# Altium PCB Machine_Side_v1.0.PcbDoc
Units mm, origin at the board's own origin, x right, y up, seen from the top; angles counter-clockwise.
Board outline 21.7 x 29.9 mm, 2 copper layers (Top Layer, Bottom Layer), stack 1.569 mm thick; 4 components, 7 nets, 22 pads, 3 vias.
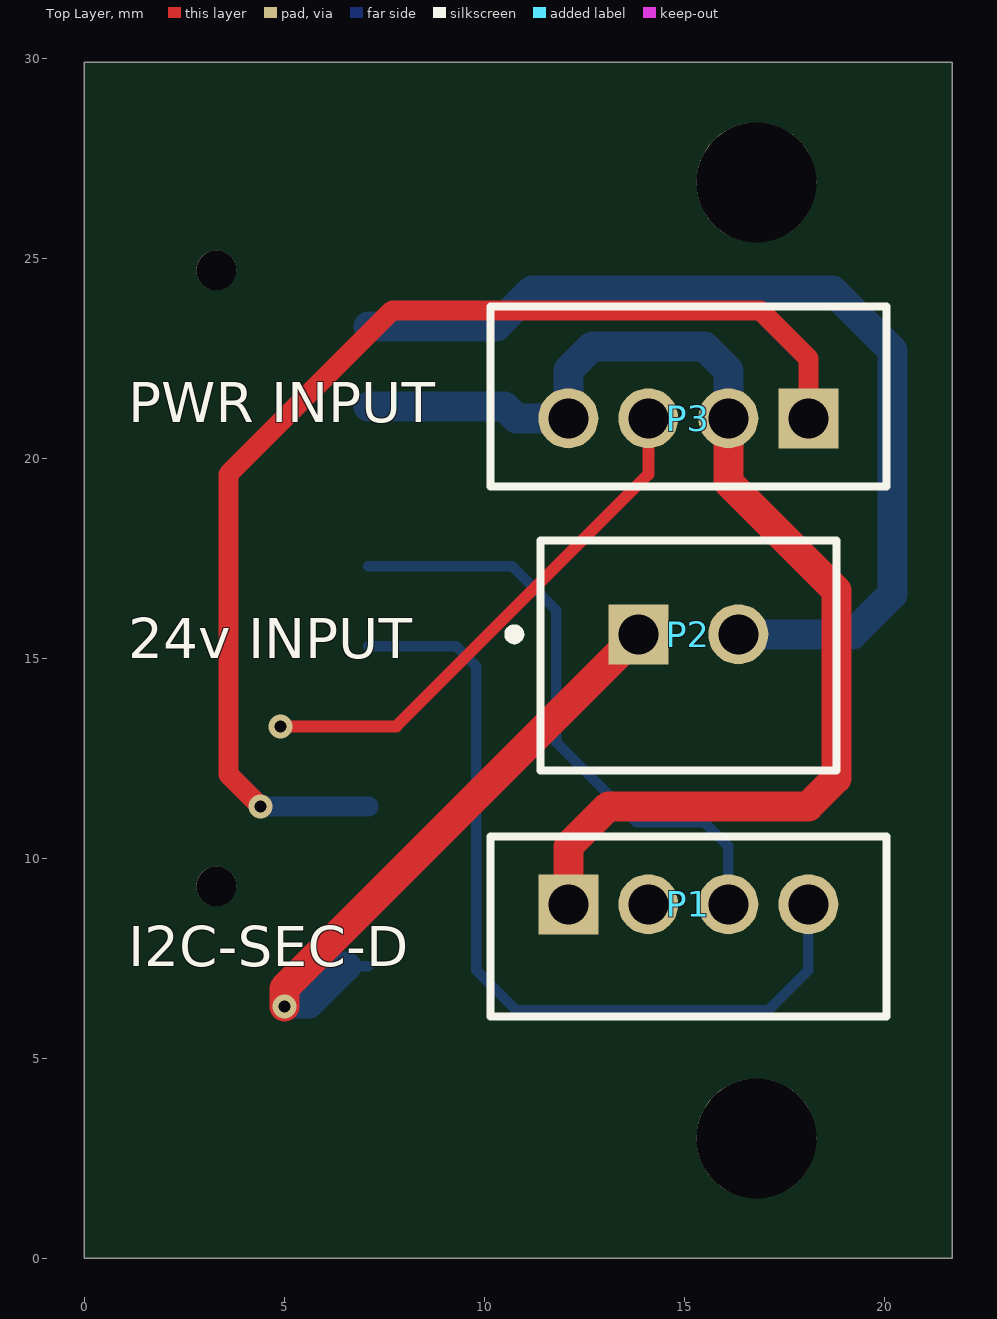
[diagram p0: Top Layer view]
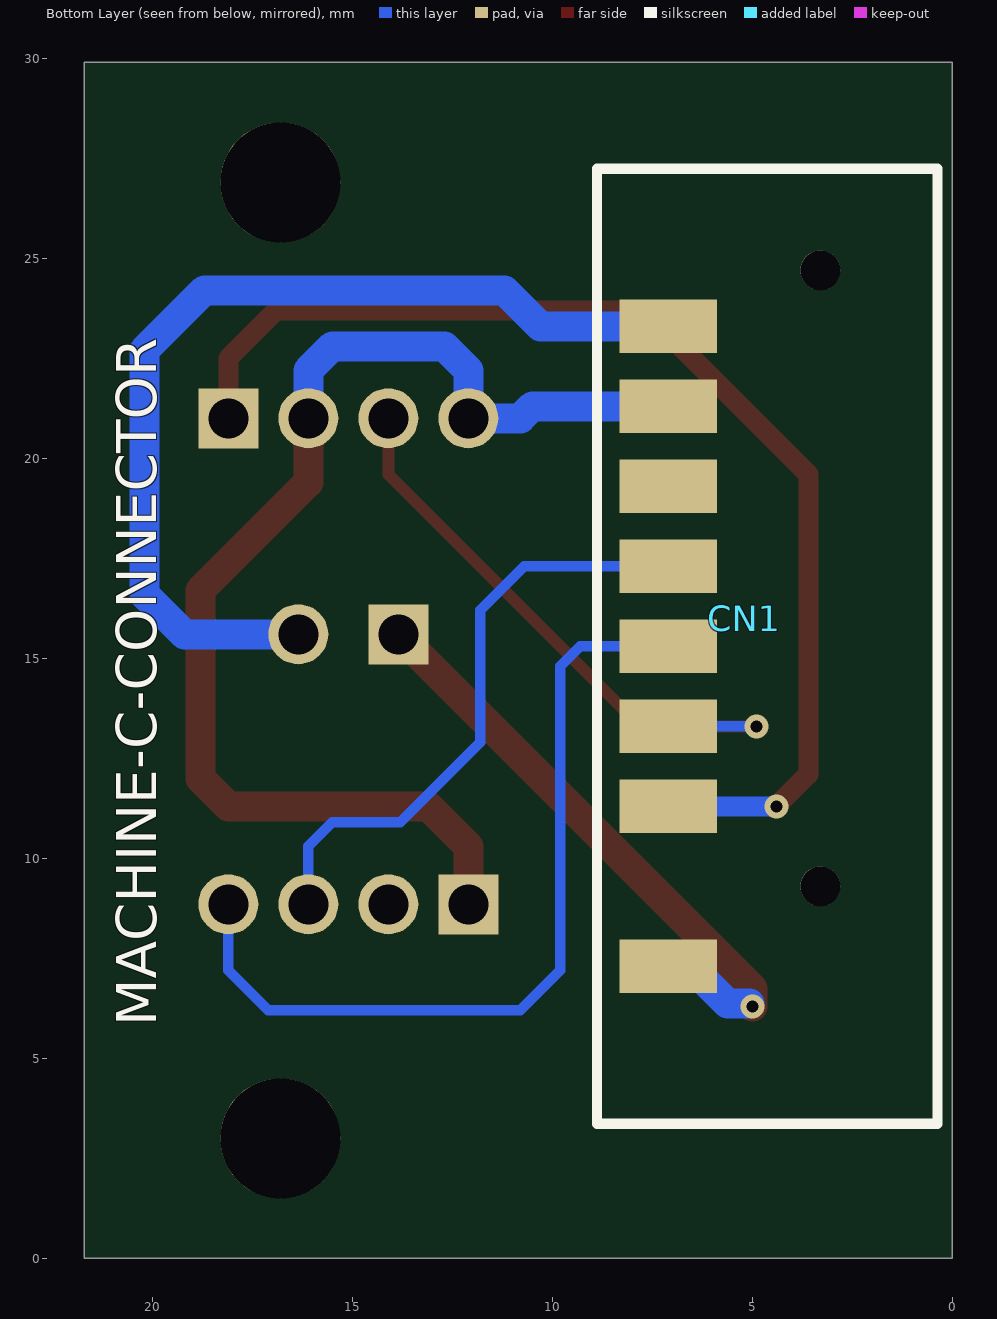
[diagram p1: Bottom Layer view, seen from below]

## Layer stack, top to bottom
Top Solder: solder mask 0.0254, SM-001, Dk 4
Top Layer: signal copper 0.035
Dielectric 1: core 1.4986, Core-043, Dk 4.3
Bottom Layer: signal copper 0.035
Bottom Solder: solder mask 0.0254, SM-001, Dk 4

## Board outline
0,0 21.7,0 21.7,29.9 0,29.9

## Design rules (kind name [scope] priority, off if disabled: settings)
Clearance [All] p1: gap=0.254 ignorepadtopadclearanceinfootprint=FALSE except(0: Arc-Hole Track-Hole SMDPad-Hole THPad-Hole Via-Hole Fill-Hole Poly-Hole Region-Hole Text-Hole)
HoleSize [All] p1: absolutevalues=TRUE maxlimit=4 minlimit=0.025 maxpercent=80.000 minpercent=20.000
PolygonConnect [All] p1: connectstyle=Relief reliefconductorwidth=0.254 reliefentries=4 polygonreliefangle="90 Angle" airgapwidth=0.254
RoutingVias [All] p1: holewidth=0.711 width=1.27 viastyle="Through Hole" minholewidth=0.711 minwidth=1.27 maxholewidth=0.711 maxwidth=1.27
SolderMaskExpansion [All] p1: expansion=0.102 istentingtop=FALSE
Width [All] p1: maxlimit=1 minlimit=0.254 preferedwidth=0.254
29 further rules are at their usual default settings.

## Components (designator, comment, footprint, x,y, rotation, side; value= is the part's Value field where it differs from the comment)
CN1 "Battery CONN" 1747786-1 7.1,7.3 r90 bottom
P1 "B4B-PH-K-S(LF)(SN)" JST-B4B-PH-K-S_V 15.1,8.3 r0 top
P2 "B2B-XH-A(LF)(SN)" JST-B2B-XH-A_V 15.1,15.6 r0 top
P3 "B4B-PH-K-S(LF)(SN)" JST-B4B-PH-K-S_V 15.1,21.55 r180 top

## Footprints (in the part's own frame and the unit in brackets; to place one, negate y for a bottom-side part, rotate by r counter-clockwise, add the part's x,y. Pads: shape width x height; smd on the part's side, far side on the other; paste and mask are expansions set on the pad)
1747786-1 [mm]
  rect 1.33x2.43 smd: 1(0,0) 2(4,0) 3(6,0) 4(8,0) 5(10,0) 6(12,0) 7(14,0) 8(16,0)
  round 1 hole 1 unplated: ""(2,-3.8) ""(17.4,-3.8)
  silkscreen extent -3.94,-6.73 19.94,1.78, body extent -3.6,-6.21 19.6,0.69, height 6.56
JST-B2B-XH-A_V [mm] "Header, 2-Leads, Body 7.4x5.75mm, Pitch 2.5mm"
  rect 1.5x1.5 hole 1: 1(-1.25,0)
  round 1.5 hole 1: 2(1.25,0)
  silkscreen extent -4.47,-3.4 3.7,2.35, body extent -3.7,-3.4 3.7,2.35, height 7
JST-B4B-PH-K-S_V [mm] "Connector, 4-Leads, Body 9.9x4.5mm, Pitch 2mm"
  rect 1.5x1.5 hole 1: 1(-3,0.55)
  round 1.5 hole 1: 2(-1,0.55) 3(1,0.55) 4(3,0.55)
  silkscreen extent -4.95,-2.25 4.95,2.25, body extent -4.95,-2.25 4.95,2.25, height 6

## Part data
CN1: library part 1747786-1
P1 P3: library part CMP-2000-05165-1, "Male Header, Pitch 2 mm, 1 x 4 Position, Height 6 mm, Tail Length 3.4 mm, -25 to 85 degC, RoHS, Bulk", Manufacturer=JST, Datasheet URL=http://datasheet.octopart.com/B4B-PH-K-S%28LF%29%28SN%29-JST-datasheet-10558886.pdf, Datasheet Version=Apr-09, Manufacturer URL=http://www.jst.com/home2.html, No of Positions=4, Pitch=2mm, Style/Orientation=StraightHeader/Plug, Termination=Crimp, Type=ShroudedHeader
P2: library part CMP-2000-05888-1, "Male Header, Pitch 2.5 mm, 1 x 2 Position, Height 7 mm, Tail Length 3.4 mm, -25 to 85 degC, RoHS, Bulk", Manufacturer=JST, Package Description="Male Header, Pitch 2.5 mm, 1 x 2 Position, Height 7 mm, Tail Length 3.4 mm", Package Reference=B2B-XH-A, Datasheet URL=http://www.jst-mfg.com/product/pdf/eng/eXH.pdf, Datasheet Version=05/2016, Manufacturer URL=http://www.jst.com/home2.html, Mounting Technology=ThroughHole, No of Positions=2, Pitch=2.5mm, Style/Orientation=StraightHeader/Plug, Termination=Crimp, Type=ShroudedHeader

## Free pads (board coordinates)
  round 3 hole 3 unplated: ""(16.8,3) ""(16.8,26.9)

## Via types
v1: diameter 0.6/0.6 (per signal layer), hole 0.3, Top Layer to Bottom Layer, tented both sides, 3 vias

## Nets (pads, with @x,y where several pads share a name; then routed paths per layer and width w, separated by ;. In a path a pad name is that pad's centre, name@x,y a point inside that pad or via, vN(x,y) a via of type N, cw(c..) or ccw(c..) an arc to the next point about the centre after c; other vN are vias at no path point)
+3V3: CN1.3 P3.3 | length 15.4
  Top Layer w0.3: v1(4.9,13.3) 7.8,13.3 14.1,19.6 P3.3
  Bottom Layer w0.254: v1(4.9,13.3) CN1.3
+5V: CN1.2 P3.1 | length 29.5
  Top Layer w0.5: v1(4.4,11.3) 3.6,12.1 3.6,19.6 7.7,23.7 16.9,23.7 18.1,22.5 P3.1
  Bottom Layer w0.5: v1(4.4,11.3) CN1.2
+24V: CN1.1 P2.1 | length 15.5
  Top Layer w0.75: v1(5,6.3) 5,6.75 P2.1
  Bottom Layer w0.254: v1(5,6.3) v1@5.066,6.366 ; CN1.1@6.55,7.3 CN1.1
  Bottom Layer w0.75: v1@5.066,6.366 5.616,6.366 CN1.1@6.55,7.3
GND: CN1.7 P1.1 P3.2 P3.4 | length 31
  Top Layer w0.75: P1.1 12.1,10.3 13.1,11.3 18.1,11.3 18.8,12 18.8,16.7 16.1,19.4 P3.2
  Bottom Layer w0.75: CN1.7 10.5,21.3 10.8,21 P3.4 12.1,22.2 12.7,22.8 15.5,22.8 16.1,22.2 P3.2
PGND: CN1.8 P2.2 | length 24.5
  Bottom Layer w0.75: CN1.8 10.3,23.3 11.2,24.2 18.7,24.2 20.2,22.7 20.2,16.6 19.2,15.6 P2.2
SCL: CN1.4 P1.4 | length 21.3
  Bottom Layer w0.254: CN1.4 9.3,15.3 9.8,14.8 9.8,7.2 10.8,6.2 17.1,6.2 18.1,7.2 P1.4
SDA: CN1.5 P1.3 | length 15.3
  Bottom Layer w0.254: CN1.5 10.7,17.3 11.8,16.2 11.8,12.9 13.8,10.9 15.5,10.9 16.1,10.3 P1.3
pads on no net: CN1. CN1.6 P1.2

## Silkscreen, mask and mechanical layers (free items; w line width, h text height)
Top Overlay:
  text "PWR INPUT" at 1.1,20.9 h1
  text "24v INPUT" at 1.1,15 h1
  text "I2C-SEC-D" at 1.1,7.3 h1
Bottom Overlay:
  text "MACHINE-C-CONNECTOR" at 19.9,5.8 h1 r270